# Altium PCB PCB2.PcbDoc
Units mm, origin at the board's own origin, x right, y up, seen from the top; angles counter-clockwise.
Board outline 58.42 x 49.28 mm, 2 copper layers (Top Layer, Bottom Layer), stack 1.671 mm thick; 28 components, 16 nets, 68 pads, 4 vias.
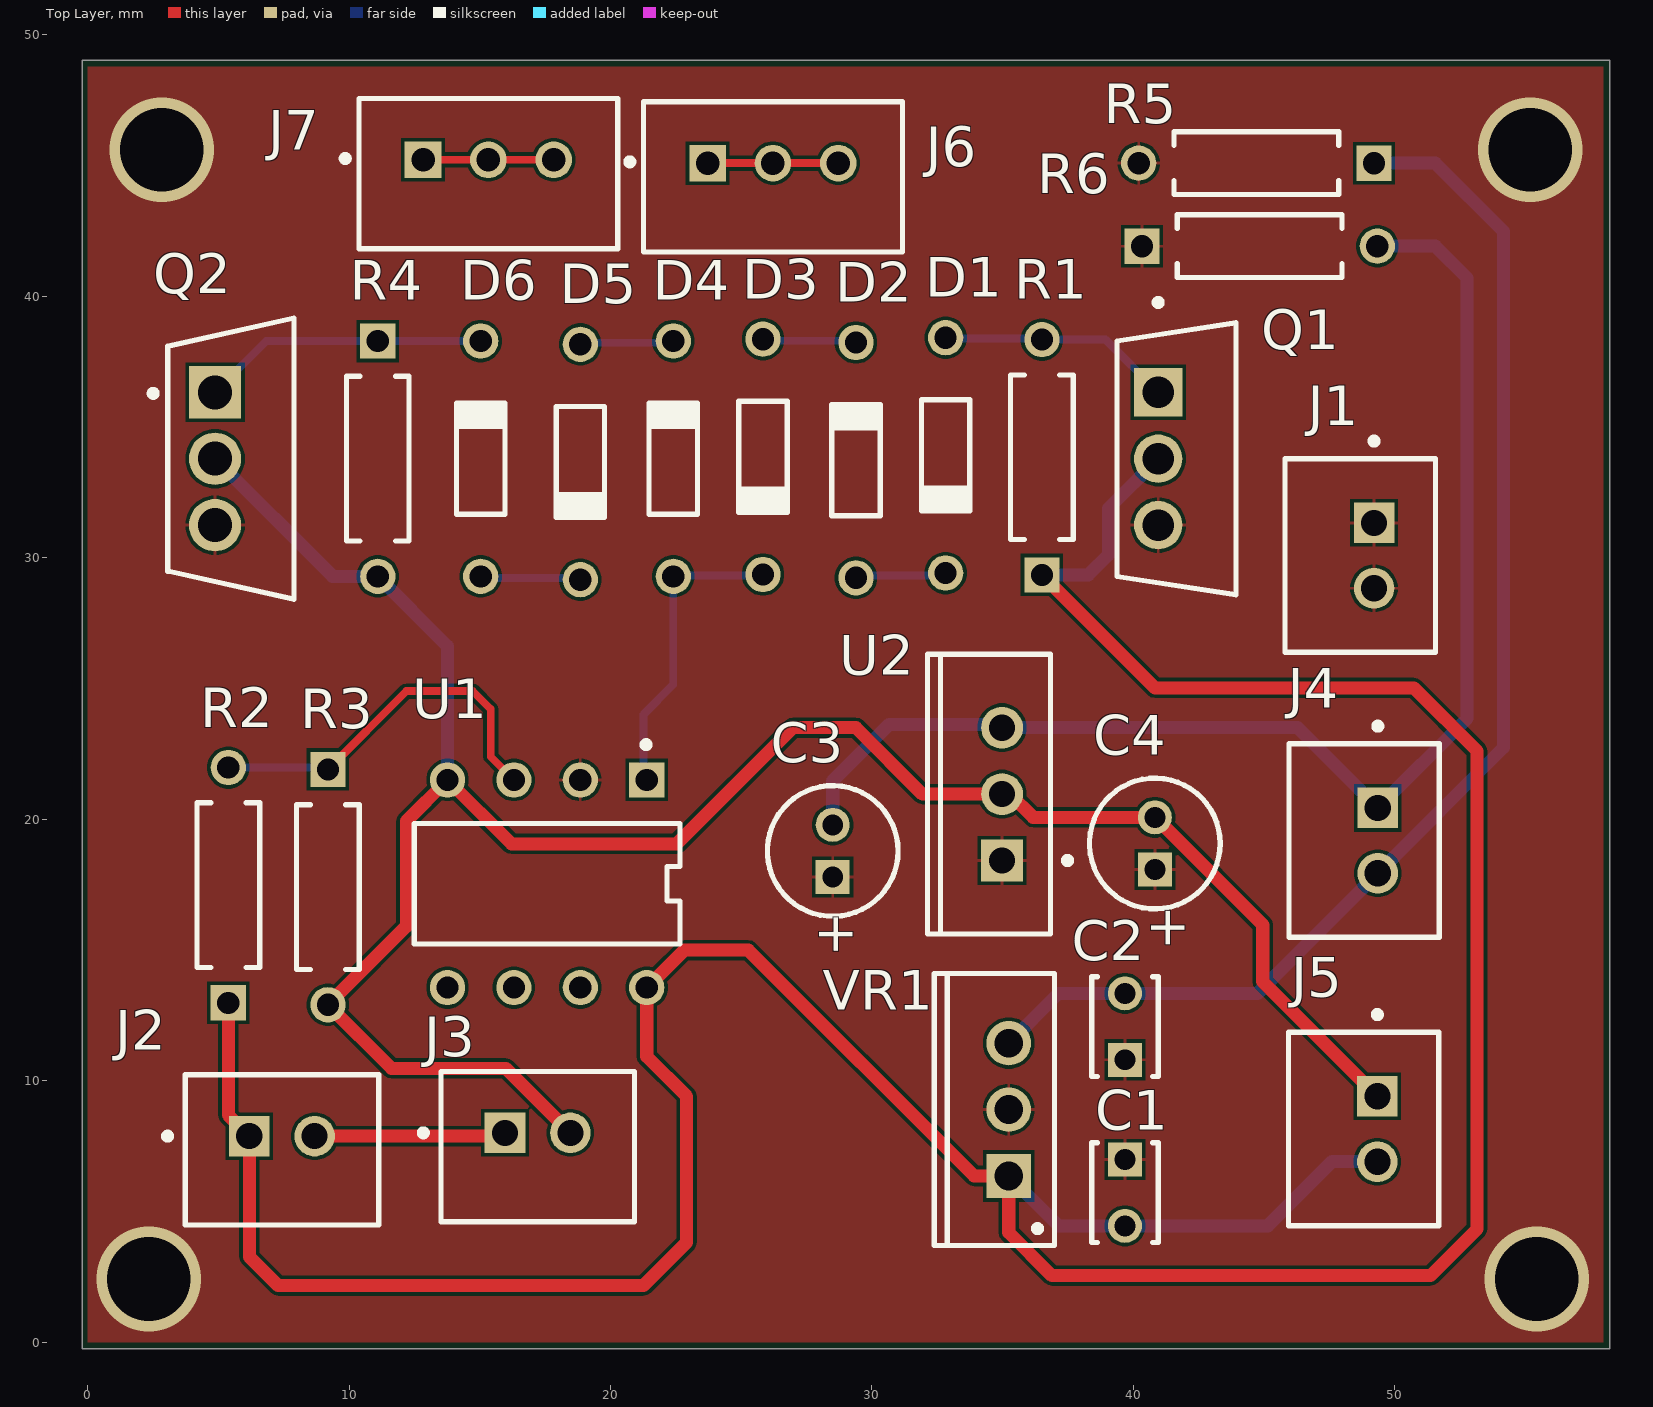
[diagram p0: Top Layer view]
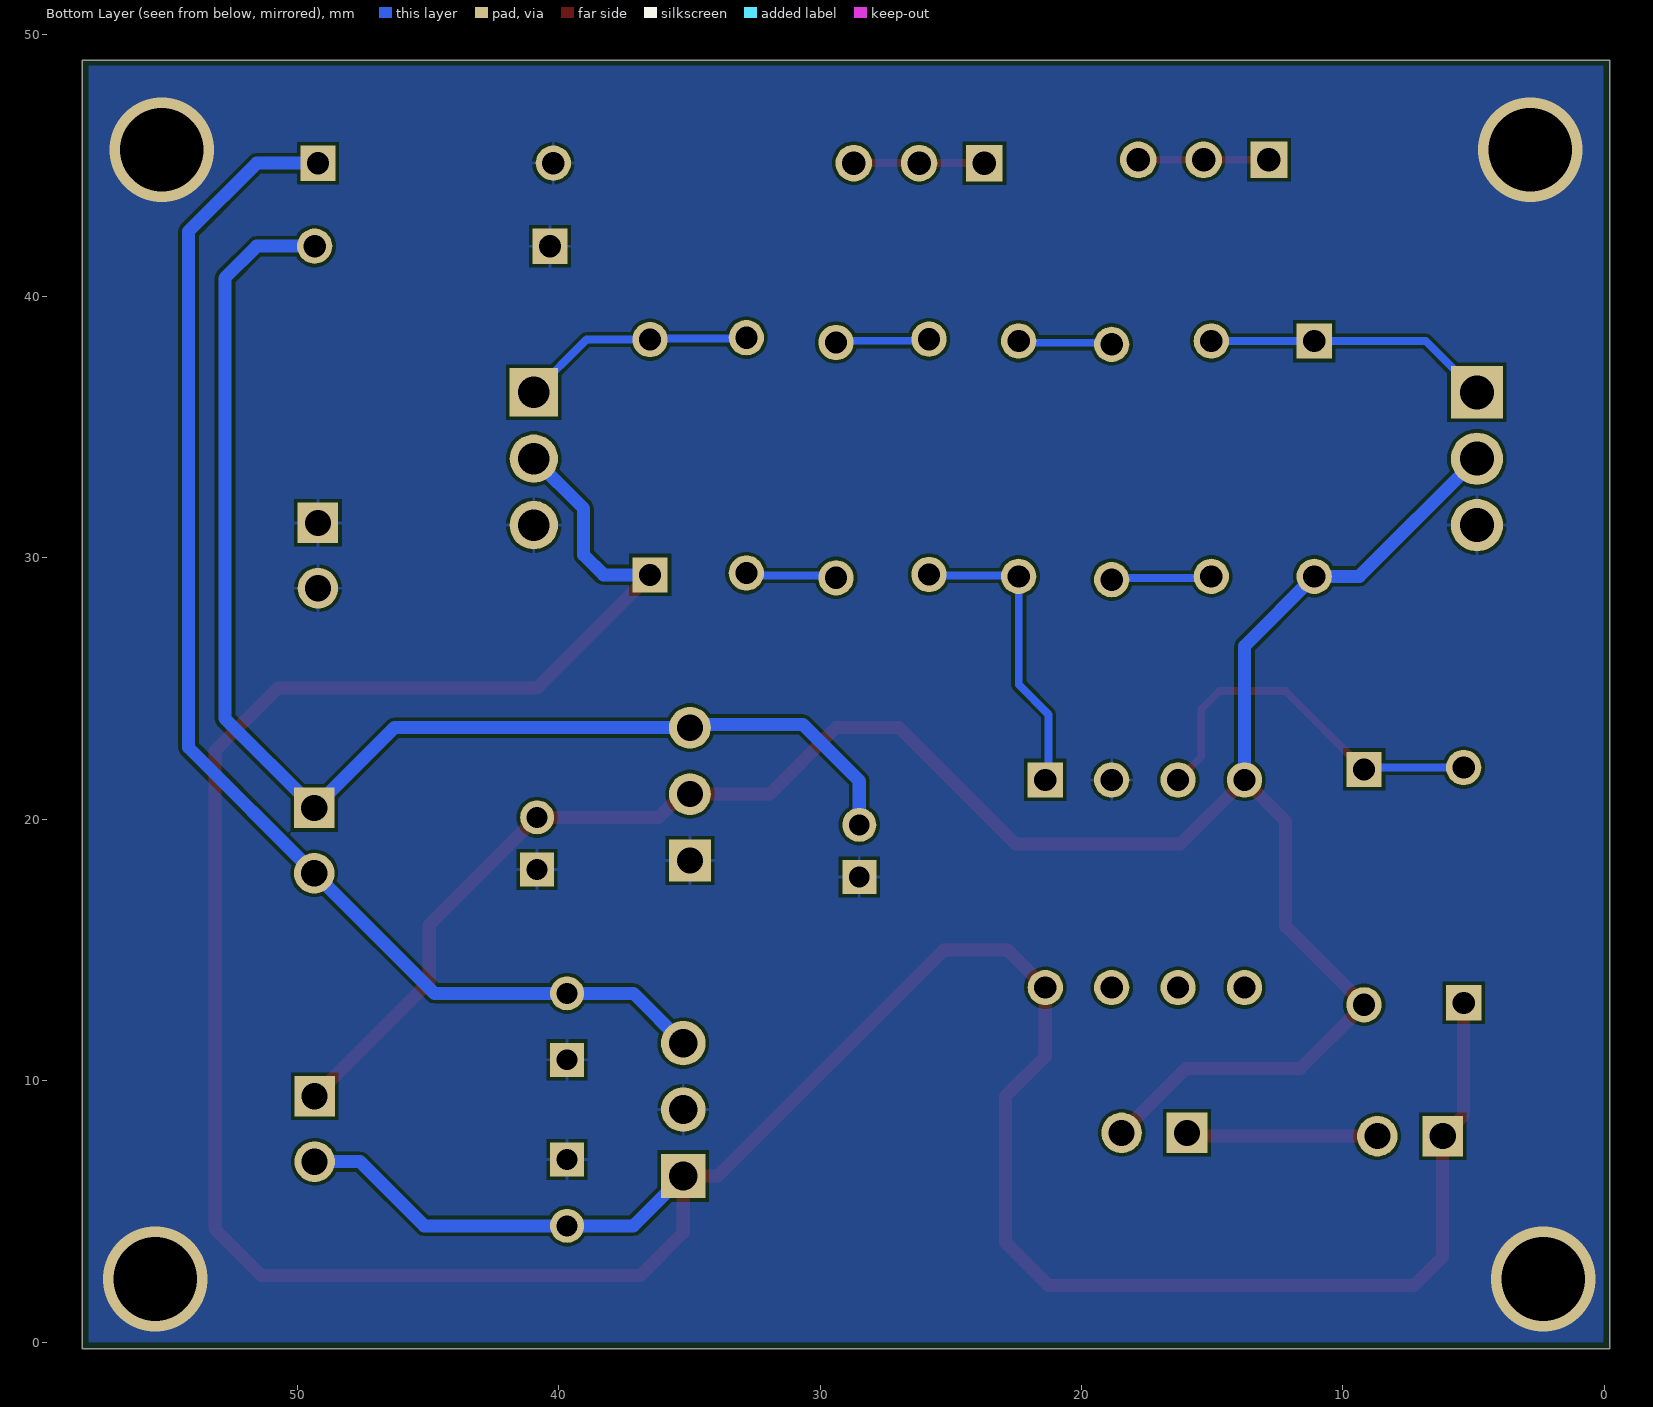
[diagram p1: Bottom Layer view, seen from below]

## Layer stack, top to bottom
Top Solder: solder mask 0.0102, Solder Resist, Dk 3.5
Top Layer: signal copper 0.0356
Dielectric 1: dielectric 1.6, FR-4, Dk 4.8
Bottom Layer: signal copper 0.0356
Bottom Solder: solder mask 0.0102, Solder Resist, Dk 3.5

## Board outline
-0.204,-0.254 58.216,-0.254 58.216,49.022 -0.204,49.022

## Design rules (kind name [scope] priority, off if disabled: settings)
BoardOutlineClearance [All] p1: gap=0.2 ignorepadtopadclearanceinfootprint=FALSE
Clearance [All] p1: gap=0.127 ignorepadtopadclearanceinfootprint=FALSE except(0.25: Arc-Hole Track-Hole SMDPad-Hole THPad-Hole Via-Hole Fill-Hole Poly-Hole Region-Hole Text-Hole)
ComponentClearance [All] p1: gap=0.127 collisioncheckmode=3 verticalgap=0.127 showdistances=TRUE
DiffPairsRouting [All] p1: maxlimit=0.254 minlimit=0.127 mostfreqgap=0.127 toplayer_minwidth=0.127 toplayer_maxwidth=25.4 toplayer_prefwidth=0.127 bottomlayer_minwidth=0.127 bottomlayer_maxwidth=25.4 bottomlayer_prefwidth=0.127 maxuncoupledlength=12.7
Height [All] p1: minheight=0 maxheight=1816.048 prefheight=12.7
HoleSize [All] p1: absolutevalues=TRUE maxlimit=6.3 minlimit=0.3 maxpercent=80.000 minpercent=20.000
HoleToHoleClearance [All] p1: gap=0.25 allowstackedmicrovias=FALSE
MinimumAnnularRing [All] p1: minimumring=0.076
MinimumSolderMaskSliver [All] p1: minsoldermaskwidth=0
PlaneClearance [All] p1: clearance=0.127
PlaneConnect PlaneConnectPowerPads [InPadClass('PowerPads')] p1: planeconnectstyle=Direct reliefexpansion=0.508 reliefentries=4 reliefconductorwidth=0.254 reliefairgap=0.254
PlaneConnect [All] p2: pad.planeconnectstyle=Relief pad.reliefexpansion=0.3 pad.reliefentries=4 pad.reliefconductorwidth=0.127 pad.reliefairgap=0.127 via.planeconnectstyle=Direct via.reliefexpansion=0.3 via.reliefentries=4 via.reliefconductorwidth=0.127 via.reliefairgap=0.127
PolygonConnect PolygonConnectPowerPads [All vs (InPadClass('PowerPads'))] p1: connectstyle=Direct reliefconductorwidth=0.254 reliefentries=4 polygonreliefangle="90 Angle" airgapwidth=0.254
PolygonConnect [All] p2: thpad.connectstyle=Relief thpad.reliefconductorwidth=0.127 thpad.reliefentries=4 thpad.polygonreliefangle="90 Angle" thpad.airgapwidth=0.127 smdpad.connectstyle=Relief smdpad.reliefconductorwidth=0.127 smdpad.reliefentries=4 smdpad.polygonreliefangle="90 Angle" smdpad.airgapwidth=0.127 via.connectstyle=Direct via.reliefconductorwidth=0.127 via.reliefentries=4 via.polygonreliefangle="90 Angle" via.airgapwidth=0.127
RoutingVias [All] p1: holewidth=0.3 width=0.6 viastyle="Through Hole" minholewidth=0.3 minwidth=0.6 maxholewidth=0.6 maxwidth=6.6
SilkToSilkClearance [All] p1: silktosilkclearance=0
SilkToSolderMaskClearance [IsPad] p1: minsilkscreentomaskgap=0.127 clearancetoexposedcopper=TRUE
SolderMaskExpansion [All] p1: expansion=0.075 istentingtop=FALSE
Width [All] p1: maxlimit=25.4 minlimit=0.127 preferedwidth=0.127 minimp=50.000000 maximp=50.000000 favimp=50.000000
20 further rules are at their usual default settings.

## Components (designator, comment, footprint, x,y, rotation, side; value= is the part's Value field where it differs from the comment)
C1 "330nF" KEMT-C315-THT-2 39.674,5.715 r270 top
C2 "100nF" KEMT-C315-THT-2 39.674,12.065 r90 top
C3 "ECA-1HHG010" CAPPR55-200-1100X500X1200 28.498,18.78 r90 top
C4 "ECA1HM2R2" CAPPR55-200-1100X500X1200 40.817,19.066 r90 top value=2.2ÂµF
D1 "1N4148" NXP-SOD27-2_V 32.816,33.909 r270 top
D2 "1N4148" NXP-SOD27-2_V 29.387,33.727 r90 top
D3 "1N4148" NXP-SOD27-2_V 25.831,33.854 r270 top
D4 "1N4148" NXP-SOD27-2_V 22.402,33.782 r90 top
D5 "1N4148" NXP-SOD27-2_V 18.846,33.655 r270 top
D6 "1N4148" NXP-SOD27-2_V 15.036,33.782 r90 top
J1 "B2B-XH-A(LF)(SN)" FP-B2B-XH-A_LF_SN-MFG 48.674,30.079 r270 top
J2 "B2B-XH-A(LF)(SN)" FP-B2B-XH-A_LF_SN-MFG 7.436,7.349 r0 top
J3 "B2B-XH-A(LF)(SN)" FP-B2B-XH-A_LF_SN-MFG 17.215,7.476 r0 top
J4 "B2B-XH-A(LF)(SN)" FP-B2B-XH-A_LF_SN-MFG 48.818,19.177 r270 top
J5 "B2B-XH-A(LF)(SN)" FP-B2B-XH-A_LF_SN-MFG 48.801,8.148 r270 top
J6 "B3B-XH-A(LF)(SN)" FP-B3B-XH-A_LF_SN-MFG 26.212,44.56 r0 top
J7 "B3B-XH-A(LF)(SN)" FP-B3B-XH-A_LF_SN-MFG 15.33,44.687 r0 top
Q1 "IRFZ44VPBF" FP-PG-TO220-3-MFG#1 41.649,33.782 r0 top
Q2 "IRF4905PBF" FP-PG-TO220-3-MFG#2 5.486,33.782 r0 top
R1 "CFR-25JB-52-470K" RESA60-630X240 36.499,33.837 r90 top value=1k
R2 "CFR-25JB-52-470K" RESA60-630X240 5.384,17.471 r90 top value=1k
R3 "CFR-25JB-52-470K" RESA60-630X240 9.194,17.399 r270 top value=1k
R4 "CFR-25JB-52-470K" RESA60-630X240 11.099,33.782 r270 top value=1k
R5 "CFR-25JB-52-470K" RESA60-630X240 44.699,45.085 r180 top value=1k
R6 "CFR-25JB-52-470K" RESA60-630X240 44.826,41.91 r0 top value=1k
U1 "LM358AN" FP-626-05-MFG 17.576,17.526 r270 top
U2 "LM7912CT/NOPB" NDE0003A 34.975,20.955 r90 top
VR1 "L7805CV" TO220 35.229,8.89 r90 top

## Footprints (in the part's own frame and the unit in brackets; to place one, negate y for a bottom-side part, rotate by r counter-clockwise, add the part's x,y. Pads: shape width x height; smd on the part's side, far side on the other; paste and mask are expansions set on the pad)
CAPPR55-200-1100X500X1200 [mm] "THD, 2-Leads, Dia 5mm, Body Length 11mm"
  rect 1.3x1.3 hole 0.8: 1(-1,0)
  round 1.3 hole 0.8: 2(1,0)
  silkscreen extent -2.5,-2.5 2.5,2.5, body extent -2.5,-2.5 2.5,2.5, height 12
FP-626-05-MFG [mm]
  rect 1.35x1.35 hole 0.85 paste-1000 mask+0: 1(-3.97,3.81)
  round 1.35 hole 0.85 paste-1000 mask+0: 2(-3.97,1.27) 3(-3.97,-1.27) 4(-3.97,-3.81) 5(3.97,-3.81) 6(3.97,-1.27) 7(3.97,1.27) 8(3.97,3.81)
  silkscreen extent -5.44,-5.08 2.3,5.08, body extent -4.74,-5.31 4.74,5.31, height 0.25
FP-B2B-XH-A_LF_SN-MFG [mm]
  rect 1.55x1.55 hole 1 paste-1000 mask+0: 1(-1.25,0.525)
  round 1.55 hole 1 paste-1000 mask+0: 2(1.25,0.525)
  silkscreen extent -4.5,-2.88 3.7,2.88, body extent -3.8,-2.98 3.8,2.98, height 0.25
FP-B3B-XH-A_LF_SN-MFG [mm]
  rect 1.4x1.4 hole 0.9 paste-1000 mask+0: 1(-2.5,0.525)
  round 1.4 hole 0.9 paste-1000 mask+0: 2(0,0.525) 3(2.5,0.525)
  silkscreen extent -5.6,-2.88 4.95,2.88, body extent -5.05,-2.98 5.05,2.98, height 0.25
FP-PG-TO220-3-MFG#1 [mm]
  rect 1.85x1.85 hole 1.2 paste-1000 mask+0: 1(-0.705,2.54)
  round 1.85 hole 1.2 paste-1000 mask+0: 2(-0.705,0) 3(-0.705,-2.54)
  silkscreen extent -2.27,-5.2 2.27,6.1, body extent -2.37,-5.55 2.37,5.55, height 0.25
FP-PG-TO220-3-MFG#2 [mm]
  rect 2x2 hole 1.3 paste-1000 mask+0: 1(-0.61,2.54)
  round 2 hole 1.3 paste-1000 mask+0: 2(-0.61,0) 3(-0.61,-2.54)
  silkscreen extent -3.1,-5.38 2.41,5.38, body extent -2.51,-5.48 2.51,5.48, height 0.25
KEMT-C315-THT-2 [mm] "THD, 2-Leads, Body 3.81x2.54mm"
  rect 1.3x1.3 hole 0.8: 1(-1.27,0)
  round 1.3 hole 0.8: 2(1.27,0)
  silkscreen extent -1.91,-1.27 1.91,1.27, body extent -1.91,-1.27 1.91,1.27, height 4.66
NDE0003A [mm] "FM, 3-Leads, Body 10.7x4.7mm, Pitch 2.54mm"
  rect 1.6x1.6 hole 1: 1(-2.54,0)
  round 1.6 hole 1: 2(0,0) 3(2.54,0)
  silkscreen extent -5.35,-2.63 5.35,2.85, body extent -5.4,-1.9 5.4,2.9, height 19.4
NXP-SOD27-2_V [mm] "SOD27, 2-Leads, Dia 1.85mm, Body Length 4.25mm, Pin Spacing 9mm"
  round 1.35 hole 0.85: 1(-4.5,0) 2(4.5,0)
  silkscreen extent -2.12,-0.93 2.12,0.92, body extent -4.78,-0.93 4.78,0.92, height 1.85
RESA60-630X240 [mm] "Axial Resistor, 2-Leads, Dia 2.4mm, Body Length 6.3mm"
  rect 1.35x1.35 hole 0.85: 1(-4.5,0)
  round 1.35 hole 0.85: 2(4.5,0)
  silkscreen extent -3.15,-1.2 3.15,1.2, body extent -4.77,-1.19 4.77,1.2, height 2.4
TO220 [mm] "TO, Thru-Hole, Vertical, Heatsink Mounted; 3 In-Line Leads; Pitch 2.54 mm"
  rect 1.7x1.7 hole 1.1: 1(-2.54,0)
  round 1.7 hole 1.1: 2(0,0) 3(2.54,0)
  silkscreen extent -5.2,-1.75 5.2,2.85, body extent -5.25,-1.8 5.25,2.9, height 19.7

## Part data
C1 C2: library part CMP-1664-00008-1, "Capacitor, Ceramic, 22 pF, +/-10 %, 100 V, -55 to 125 degC, 2-Pin THD, RoHS, Bulk", Case\Package=TO-220, Max Input Voltage="40 V", Max Operating Temperature="125 degC", Max Ouput Current="1.5 A", Min Input Voltage="4.2 V", Min Operating Temperature="0 degC", Output Voltage="1.2 V", Package Quantity=50, ComponentLink1Description="Manufacturer URL", ComponentLink1URL=http://www.kemet.com/, ComponentLink2Description=Datasheet, ComponentLink2URL=http://capacitoredge.kemet.com/capedge2/DataSheet/Datasheet-C315C220K1G5TA.pdf?pn=C315C220K1G5TA{BULK}, DatasheetVersion=Aug-16, Height="9.28 mm", Length="10.28 mm", Mount="Through Hole", Output Current="1.5 A", Outputs=1, PackageDescription="2-Pin Through Hole Device, Body 3.81 x 2.54 mm", PackageReference=C315-THT-2, Packaging=Rail/Tube, Pins=3, Radiation Hardening=No, REACH SVHC="No SVHC", RoHSCompliant=true, Weight="0.08113 oz", Width="4.82 mm"
C3: library part CMP-1665-00039-1, "Aluminum Electrolytic Capacitor, 1 uF, +/- 20%, 50 V, -55 to 105 degC, 2-Pin THD, RoHS, Bulk", Max Operating Temperature="70 degC", Min Operating Temperature="-30 degC", Package Quantity=150, Channels=2, ComponentLink1Description="Manufacturer URL", ComponentLink1URL=http://www.panasonic.com/, ComponentLink2Description=Datasheet, ComponentLink2URL=https://datasheet.ciiva.com/7275/94060-7275472.pdf, DatasheetVersion=Mar-05, Mount="Through Hole", PackageDescription="2-Pin Radial Lead, Dia 5 mm, Body Length 11 mm", PackageReference=CAPPR55-200-1100X500X1200, Packaging=Bulk, Radiation Hardening=No, RoHSCompliant=true
C4: library part CMP-001-00029-7, "Aluminum Electrolytic Capacitor, 2.2 uF, +/- 20%, 50 V, -40 to 85 degC, 2-Pin THD, RoHS, Bulk", Capacitor Type=Electrolytic, Case/Package=Radial, Manufacturer=Panasonic, Max Operating Temperature=85Â°C, Min Operating Temperature=-40Â°C, Package Description="2-Pin Radial Lead, Dia 5 mm, Height 12 mm", Package Quantity=200, Package Reference=CAPPR55-200-1100X500X1200, Ripple Current=20mA, Tolerance=20%, Voltage Rating=50V, Datasheet URL=https://industrial.panasonic.com/cdbs/www-data/pdf/RDF0000/ABA0000C1218.pdf, Datasheet Version="Rev. 05, 10/2016", Diameter=5mm, Lead Pitch=2mm, Manufacturer URL=http://www.panasonic.com/, Mounting Technology=TH, Packaging=Bulk, Pins=2, Ripple Current (AC)=20mA, RoHS Compliant=True
D1 D2 D3 D4 D5 D6: library part CMP-004-00000-2, "High Speed Diode, 100 V, 0.45 A, -65 to 175 degC, 2-Pin SOD27, RoHS, Bulk", Case/Package=DO, Forward Current=300mA, Forward Voltage=1V, Manufacturer=Fairchild, Max Operating Temperature=175Â°C, Max Surge Current=4A, Min Operating Temperature=-65Â°C, Package Quantity=2000, Package Reference=SOD27, Peak Reverse Current=5uA, Power=500mW, Datasheet URL=http://www.nxp.com/documents/data_sheet/1N4148_1N4448.pdf, Datasheet Version=Aug-04, Diameter=1.91mm, Elements=1, Manufacturer URL=https://www.fairchildsemi.com/, Package URL=http://www.nxp.com/documents/data_sheet/1N4148_1N4448.pdf, Packaging=Bulk, Pins=2, Recovery Time=4ns, RoHS Compliant=True
J1 J2 J3 J4 J5: library part CMP-2000-05888-3, "CONN HEADER VERT 2POS 2.5MM", Color=Natural, Contact Resistance=20mR, Current Rating=3A, Housing Color=White, Insulation Resistance=1GR, Max Operating Temperature=85Â°C, Max Voltage Rating (AC)=250V, Min Operating Temperature=-25Â°C, Connector Type="Male Pin", Contact Material=Brass, Contact Plating=Tin, Contact Type="Male Pin", Depth=5.75mm, Fastening Type=Detent, Housing Material=Polyamide, Lead Free="Lead Free", Lead Pitch=2.5mm, Length=7.4mm, Max Current Rating=3A, Max Voltage Rating (DC)=250V, Mount="Through Hole", Number of Contacts=2, Number of Positions=2, Number of Rows=1, Orientation=Straight, Packaging=Bulk, Pitch=2.5mm, REACH SVHC="No SVHC", Series=XH, Termination=Solder, Voltage Rating=250V, Voltage Rating (AC)=250V, Wire/Cable Gauge=22AWG
J6 J7: library part CMP-17439-000014-3, "CONN HEADER VERT 3POS 2.5MM", Color=Natural, Contact Resistance=20mR, Current Rating=3A, Flammability Rating="UL94 V-0", Housing Color=White, Insulation Resistance=1GR, Max Operating Temperature=85Â°C, Max Voltage Rating (AC)=250V, Min Operating Temperature=-25Â°C, Connector Type=Header, Contact Finish - Mating=TIN, Contact Material=Brass, Contact Plating=Tin, Contact Shape=Square, Contact Type="Male Pin", Depth=5.75mm, Fastening Type=Detent, Gender=Male, Housing Material=Polyamide, Insulation Color=Natural, Insulation Material=Nylon, Lead Free="Lead Free", Lead Pitch=2.5mm, Length=9.9mm, Max Current Rating=3A, Max Voltage Rating (DC)=250V, Mount="Through Hole", Number of Contacts=3, Number of Positions=3, Number of Rows=1, Orientation=Straight, Packaging=Bulk, Pitch=2.5mm, REACH SVHC="No SVHC", Series=XH, Termination=Solder, Voltage Rating=250V, Voltage Rating (AC)=250V, Wire/Cable Gauge=22AWG
Q1: library part CMP-32901-001154-1, "MOSFET N-CH 60V 55A TO220AB", Case/Package=TO-220, Continuous Drain Current (ID)=55A, Drain to Source Breakdown Voltage=60V, Drain to Source Resistance=16.5mR, Gate to Source Voltage (Vgs)=20V, Input Capacitance=1.812nF, Max Operating Temperature=175Â°C, Max Power Dissipation=115W, Min Operating Temperature=-55Â°C, Threshold Voltage=4V, Drain to Source Voltage (Vdss)=60V, Element Configuration=Single, Halogen Free="Halogen Free", Height=0.65inch, Lead Free="Lead Free", Length=0.42inch, Max Dual Supply Voltage=60V, Mount="Through Hole", Number of Pins=3, Packaging=Rail/Tube, Polarization=N, Power Dissipation=115W, Rds On Max=16.5mR, Reach SVHC Compliant=Yes, RoHS Compliant=Yes, Series=HEXFETÂ®, Turn-Off Delay Time=40ns, Turn-On Delay Time=13ns, Width=0.19inch
Q2: library part CMP-32901-000200-1, "MOSFET P-CH 55V 74A TO-220AB", Case/Package=TO-220, Continuous Drain Current (ID)=74A, Drain to Source Breakdown Voltage=-55V, Drain to Source Resistance=20mR, Gate to Source Voltage (Vgs)=20V, Input Capacitance=3.4nF, Max Operating Temperature=175Â°C, Max Power Dissipation=200W, Min Operating Temperature=-55Â°C, Threshold Voltage=-4V, Drain to Source Voltage (Vdss)=-55V, Element Configuration=Single, Halogen Free="Halogen Free", Height=0.6inch, Lead Free="Lead Free", Length=0.414inch, Max Dual Supply Voltage=-55V, Mount="Through Hole", Number of Pins=3, Packaging=Rail/Tube, Power Dissipation=200W, Rds On Max=20mR, REACH SVHC="No SVHC", RoHS Compliant=Yes, Turn-Off Delay Time=61ns, Turn-On Delay Time=18ns, Width=0.185inch
R1 R2 R3 R4 R5 R6: library part CMP-009-00055-4, "RES 470K OHM 5% 1/4W AXIAL", Case/Package=Axial, Manufacturer=Yageo, Max Operating Temperature=155Â°C, Min Operating Temperature=-55Â°C, Package Description="2-Pin Axial Lead, Dia 2.4 mm, Body Length 6.3 mm", Package Quantity=200, Package Reference=MFR-25, Power=250mW, Tolerance=1%, Voltage Rating=250V, Datasheet URL=http://www.yageo.com/documents/recent/Yageo%20LR_MFR_2013.pdf, Datasheet Version=Apr-13, Manufacturer URL=http://www.yageo.com/, Mounting Technology=TH, Packaging=Bulk, RoHS Compliant=True
U1: library part CMP-07106-000007-1, "IC OPAMP GP 2 CIRCUIT 8DIP", Input Bias Current=0.045uA, Input Offset Voltage=2mV, Manufacturer="ON Semiconductor", Max Dual Supply Voltage=16V, Max Junction Temp=+150Â°C, Max Supply Voltage=32V, Min Dual Supply Voltage=1.5V, Min Supply Voltage=3V, Nominal Supply Current=0.5-0.8mA, Output Current per Channel=100-15000uA, Package=626-05, Temperature="0Â°C to +70Â°C", Temperature Range High=+70Â°C, Temperature Range Low=0Â°C, Voltage Gain=100dB, Automotive=No, Category=IC, ComponentLink2Description=Datasheet, ComponentLink2URL=https://www.onsemi.com/pub/Collateral/LM358A-D.pdf, Device Class L1="Integrated Circuits (ICs)", Device Class L2="Linear ICs", Device Class L3="Amplifiers - Op Amps", Digikey Description="IC OPAMP GP 2 CIRCUIT 8DIP", Footprint Url=https://www.onsemi.com/pub/Collateral/626-05.PDF, Height=5.33mm, Ipc Land Pattern Name=DIP794W46P254L1016H533Q8, Lead Free=Yes, Manufacturer Part Number=LM358AN, Mouser Description="Operational Amplifiers - Op Amps DIP-8 Dual Op Amp", Number of Channels=2, Octopart=https://octopart.com/lm358an-on+semiconductor-84329698, RoHS=TRUE, Standoff Height=0.38mm
U2: library part CMP-0062-02473-3, "3-Terminal Negative Regulator, 3-pin TO-220, Pb-Free", Manufacturer="Texas Instruments", PackageTopMarking=NSUZXYTTE#*LM7912CT, PowerWise=N, ComponentLink1Description="Datasheet URL", ComponentLink1URL=http://www.ti.com/general/docs/lit/getliterature.tsp?genericPartNumber=LM7912&fileType=pdf, CompType="LDO IC", PackageDescription="TO-220, Molded, 3 Lead, Straight", PackageReference=NDE0003A, PinCount=3, RoHS=Y
VR1: library part CMP-019-00018-3, Case/Package=TO-220, Dropout Voltage=2V, Manufacturer=STMicroelectronics, Max Input Voltage=35V, Max Operating Temperature=125Â°C, Max Ouput Current=1.5A, Max Supply Voltage=20V, Min Input Voltage=7V, Min Operating Temperature=0Â°C, Min Supply Voltage=8V, Nominal Output Voltage=5V, Package Quantity=50, Datasheet URL=https://datasheet.ciiva.com/15111/getdatasheetpartid-44136-15111027.pdf, Datasheet Version="Rev 30, 09/2012", Manufacturer URL=http://www.st.com/, Mounting Technology=TH, Output Current=1.5A, Output Voltage=5V, Outputs=1, Packaging=Rail/Tube, Pins=3, RoHS Compliant=True

## Via types
v1: diameter 4, hole 3.2, Top Layer to Bottom Layer, 4 vias

## Nets (pads, with @x,y where several pads share a name; then routed paths per layer and width w, separated by ;. In a path a pad name is that pad's centre, name@x,y a point inside that pad or via, vN(x,y) a via of type N, cw(c..) or ccw(c..) an arc to the next point about the centre after c; other vN are vias at no path point)
GND: C1.1 C2.1 C3.1 C4.1 J1.1 J1.2 Q1.3 Q2.3 R5.2 R6.1 U1.2 U2.1 VR1.2 | length 0.1
  Bottom Layer w0.254: J1.1@49.112,31.242 J1.1
  other v1: 2.336,2.413 55.422,2.413 2.844,45.593 55.168,45.593
NetC2_2: C2.2 J4.2 R5.1 VR1.3 | length 49.4
  Bottom Layer w0.5: VR1.3 37.134,13.335 C2.2 44.751,13.335 J4.2 54.152,22.736 54.152,42.473 51.54,45.085 R5.1
NetC3_2: C3.2 J4.1 R6.2 U2.3 | length 50.4
  Bottom Layer w0.3: U2.3@34.848,23.622 U2.3
  Bottom Layer w0.5: C3.2 28.498,21.463 30.657,23.622 U2.3@34.848,23.622 ; U2.3 46.275,23.495 J4.1 52.755,23.839 52.755,40.695 51.54,41.91 R6.2
NetD1_1: D1.1 Q1.1 R1.2 | length 9
  Bottom Layer w0.254: D1.1 D1.1@32.852,38.373 ; R1.2@36.463,38.373 R1.2
  Bottom Layer w0.3: D1.1@32.852,38.373 R1.2@36.463,38.373 ; R1.2 38.929,38.337 Q1.1
NetD1_2: D1.2 D2.1 | length 3.5
  Bottom Layer w0.254: D2.1 D2.1@29.478,29.318 ; D1.2@32.725,29.318 D1.2
  Bottom Layer w0.3: D2.1@29.478,29.318 D1.2@32.725,29.318
NetD2_2: D2.2 D3.1 | length 3.6
  Bottom Layer w0.254: D3.1 D3.1@25.895,38.291 ; D2.2@29.324,38.291 D2.2
  Bottom Layer w0.3: D3.1@25.895,38.291 D2.2@29.324,38.291
NetD3_2: D3.2 D4.1 U1.1 | length 12
  Bottom Layer w0.254: D4.1 D4.1@22.438,29.318 ; D3.2@25.795,29.318 D3.2
  Bottom Layer w0.3: U1.1@21.513,21.623 U1.1 21.259,21.623 21.259,24.003 22.402,25.146 D4.1 ; D4.1@22.438,29.318 D3.2@25.795,29.318
NetD4_2: D4.2 D5.1 | length 3.6
  Bottom Layer w0.254: D5.1 D5.1@18.91,38.219 ; D4.2@22.013,38.219 22.076,38.282 D4.2
  Bottom Layer w0.3: D5.1@18.91,38.219 D4.2@22.013,38.219
NetD5_2: D5.2 D6.1 | length 4.1
  Bottom Layer w0.254: D6.1 D6.1@15.1,29.218 ; D5.2@18.584,29.218 18.846,28.956 D5.2
  Bottom Layer w0.3: D6.1@15.1,29.218 D5.2@18.584,29.218
NetD6_2: D6.2 Q2.1 R4.1 | length 11
  Bottom Layer w0.3: Q2.1 6.836,38.282 R4.1 D6.2
NetJ2_2: J2.2 J3.1 | length 7.3
  Top Layer w0.5: J2.2 15.838,7.874 J3.1
NetJ6_1: J6.1 J6.2 J6.3 | length 5
  Top Layer w0.3: J6.1 J6.2 J6.3
NetJ7_1: J7.1 J7.2 J7.3 | length 5
  Top Layer w0.3: J7.1 J7.2 J7.3
NetR2_2: R2.2 R3.1 U1.3 | length 14.7
  Top Layer w0.3: R3.1 12.187,24.892 14.733,24.892 15.419,24.206 15.419,22.383 U1.3
  Bottom Layer w0.3: R2.2 9.122,21.971 R3.1
VCC: C1.2 J2.1 J5.2 Q1.2 R1.1 R2.1 U1.8 VR1.1 | length 139
  Top Layer w0.3: C1.2@39.674,4.351 C1.2
  Top Layer w0.5: R2.1 5.384,8.676 J2.1 6.186,3.262 7.289,2.159 21.259,2.159 22.91,3.81 22.91,9.398 21.386,10.922 U1.8 22.816,14.986 25.273,14.986 33.909,6.35 VR1.1 35.229,4.191 36.88,2.54 51.358,2.54 53.136,4.318 53.136,22.606 50.723,25.019 40.817,25.019 R1.1
  Bottom Layer w0.3: R1.1 R1.1@36.626,29.464
  Bottom Layer w0.5: VR1.1 37.134,4.445 C1.2 45.135,4.445 47.588,6.898 J5.2 ; R1.1 38.277,29.337 39.039,30.099 39.039,31.877 Q1.2
VEE: C4.2 J3.2 J5.1 Q2.2 R3.2 R4.2 U1.4 U2.2 | length 84.5
  Top Layer w0.5: J3.2 15.997,10.469 11.624,10.469 R3.2 12.192,15.897 12.192,19.922 U1.4 16.212,19.05 22.529,19.05 26.974,23.495 29.387,23.495 31.927,20.955 U2.2 35.273,20.955 36.162,20.066 C4.2 40.83,20.066 44.943,15.953 44.943,13.781 J5.1
  Bottom Layer w0.3: Q2.2@4.876,33.528 Q2.2
  Bottom Layer w0.5: Q2.2 9.376,29.282 R4.2 13.766,26.615 U1.4
pads on no net: U1.5 U1.6 U1.7

## Polygon pours and split planes (outlines as drawn)
GND on Top Layer "GND_L01_P000" (solid, pour order 0): 57.962,48.768 57.962,0 -0.077,0 -0.077,48.768
GND on Bottom Layer "GND_L02_P001" (solid, pour order 1): 57.962,48.895 57.962,0 0.05,0 0.05,48.768 -0.077,48.895

## Text inside footprints (layer, text, board x,y; h text height)
C3: Top Overlay "+" at 29.26,14.732 h1.5 r90
C4: Top Overlay "+" at 41.96,14.986 h1.5 r90